# EAGLE board headstageNano_CMOS_FixedRef (EAGLE 7.1.0)
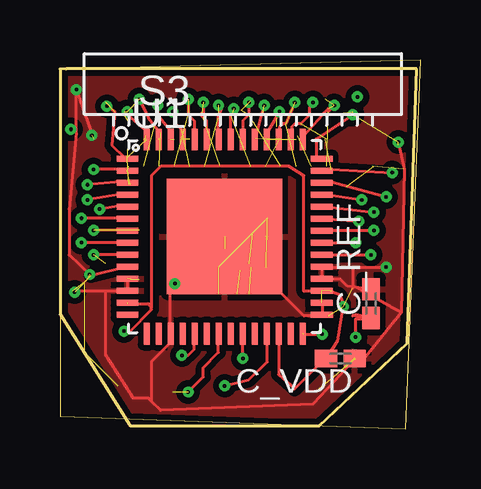
[diagram p0: board, top side]
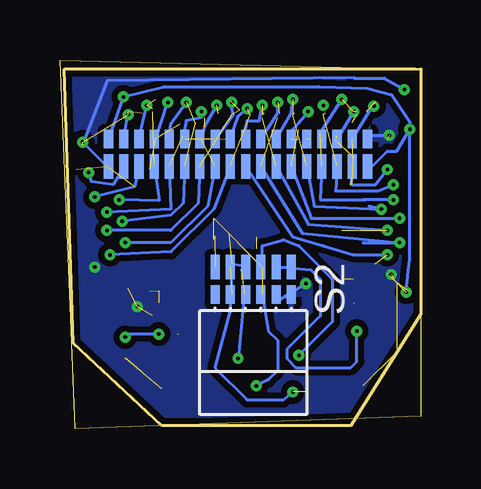
[diagram p1: board, bottom side, seen from below]

Size 15.04 x 15.36 mm. Coordinates in mm from the lower left corner, seen from the top.
Outline: 0,14.98 15.04,15.36 14.4,0 0,0.51 0,4.76
Outline: 0,14.98 0.25,14.99 14.86,14.99 14.48,3.56 10.79,0.13 2.92,0.13 0,4.76
Outline: 0,14.98 0,4.76
Copper layers (1*16): Top 0.0178mm / dielectric 59mil / Bottom 0.0178mm
Design rules "default": minimum track width 5mil, minimum drill 10mil, track to track 5mil, track to pad 5mil, pad to pad 5mil, via to via 5mil, smd to smd 5mil, copper to edge 10mil, drill to drill 16mil, minimum pad ring 6mil, minimum via ring 6mil, stop-mask expansion 3mil, vias tented up to drill 0mil, thermal gap 10mil

## Footprints (pad centres in the part's own frame; a part is rotated, then mirrored left to right if it is on the bottom)
C0402K = smd 0.925 x 0.74: 1 -0.6,0; 2 0.6,0
OMNETICS_PZN-12-AA = smd 0.381 x 0.762: B1 1.587,-1.016; B2 0.953,-1.016; B3 0.318,-1.016; B4 -0.318,-1.016; B5 -0.953,-1.016; B6 -1.587,-1.016 | smd 0.381 x 1.016: T1 1.587,-2.159; T2 0.953,-2.159; T3 0.318,-2.159; T4 -0.318,-2.159; T5 -0.953,-2.159; T6 -1.587,-2.159
OMNETICS_A79025 = smd 0.381 x 0.762 bottom: B1 -5.397,-1.016; B2 -4.763,-1.016; B3 -4.128,-1.016; B4 -3.493,-1.016; B5 -2.857,-1.016; B6 -2.223,-1.016; B7 -1.587,-1.016; B8 -0.953,-1.016; B9 -0.318,-1.016; B10 0.318,-1.016; B11 0.953,-1.016; B12 1.587,-1.016; B13 2.223,-1.016; B14 2.857,-1.016; B15 3.493,-1.016; B16 4.128,-1.016; B17 4.763,-1.016; B18 5.397,-1.016 | smd 0.381 x 1.016 bottom: T1 -5.397,-2.159; T2 -4.763,-2.159; T3 -4.128,-2.159; T4 -3.493,-2.159; T5 -2.857,-2.159; T6 -2.223,-2.159; T7 -1.587,-2.159; T8 -0.953,-2.159; T9 -0.318,-2.159; T10 0.318,-2.159; T11 0.953,-2.159; T12 1.587,-2.159; T13 2.223,-2.159; T14 2.857,-2.159; T15 3.493,-2.159; T16 4.128,-2.159; T17 4.763,-2.159; T18 5.397,-2.159
QFN56_8_X_8_LARGE = smd 0.9 x 0.25: 1 -4.05,3.25; 2 -4.05,2.75; 3 -4.05,2.25; 4 -4.05,1.75; 5 -4.05,1.25; 6 -4.05,0.75; 7 -4.05,0.25; 8 -4.05,-0.25; 9 -4.05,-0.75; 10 -4.05,-1.25; 11 -4.05,-1.75; 12 -4.05,-2.25; 13 -4.05,-2.75; 14 -4.05,-3.25; 29 4.05,-3.25; 30 4.05,-2.75; 31 4.05,-2.25; 32 4.05,-1.75; 33 4.05,-1.25; 34 4.05,-0.75; 35 4.05,-0.25; 36 4.05,0.25; 37 4.05,0.75; 38 4.05,1.25; 39 4.05,1.75; 40 4.05,2.25; 41 4.05,2.75; 42 4.05,3.25 | smd 0.25 x 0.9: 15 -3.25,-4.05; 16 -2.75,-4.05; 17 -2.25,-4.05; 18 -1.75,-4.05; 19 -1.25,-4.05; 20 -0.75,-4.05; 21 -0.25,-4.05; 22 0.25,-4.05; 23 0.75,-4.05; 24 1.25,-4.05; 25 1.75,-4.05; 26 2.25,-4.05; 27 2.75,-4.05; 28 3.25,-4.05; 43 3.25,4.05; 44 2.75,4.05; 45 2.25,4.05; 46 1.75,4.05; 47 1.25,4.05; 48 0.75,4.05; 49 0.25,4.05; 50 -0.25,4.05; 51 -0.75,4.05; 52 -1.25,4.05; 53 -1.75,4.05; 54 -2.25,4.05; 55 -2.75,4.05; 56 -3.25,4.05 | smd 4.8 x 4.8: CENTER 0,0

## Placement (x,y rotation side)
C_REF  10nF  [C0402K]  12.95,5.21 90 top
C_VDD  10uF  [C0402K]  11.68,2.92 180 top
S2  RHD2000-CABLE-AMP-SIDE  [OMNETICS_PZN-12-AA]  6.98,4.57 180 bottom
S3  OMNETICS_A79025  [OMNETICS_A79025]  7.62,13.08 0 top
U1  RHD2132_QFN  [QFN56_8_X_8_LARGE]  6.86,8 0 top

## Library data of the parts
C_REF C_VDD = resistor
S2 U1 = RHD2000
S3 = RHD2000b

## Nets
ADC_REF: C_REF.1 U1.28
AUXOUT: U1.27
CS+: S2.T1 U1.19
GND: C_REF.2 C_VDD.1 S2.B6 S3.B1 S3.T18 U1.11 U1.12 U1.17 U1.29 U1.32 U1.33 U1.CENTER
IN0: S3.T9 U1.9
IN1: S3.T8 U1.8
IN2: S3.T7 U1.7
IN3: S3.T6 U1.6
IN4: S3.T5 U1.5
IN5: S3.T4 U1.4
IN6: S3.T3 U1.3
IN7: S3.T2 U1.2
IN8: S3.B2 U1.1
IN9: S3.B3 U1.56
IN10: S3.B4 U1.55
IN11: S3.B5 U1.54
IN12: S3.B6 U1.53
IN13: S3.B7 U1.52
IN14: S3.B8 U1.51
IN15: S3.B9 U1.50
IN16: S3.B10 U1.49
IN17: S3.B11 U1.48
IN18: S3.B12 U1.47
IN19: S3.B13 U1.46
IN20: S3.B14 U1.45
IN21: S3.B15 U1.44
IN22: S3.B16 U1.43
IN23: S3.B17 U1.42
IN24: S3.T17 U1.41
IN25: S3.T16 U1.40
IN26: S3.T15 U1.39
IN27: S3.T14 U1.38
IN28: S3.T13 U1.37
IN29: S3.T12 U1.36
IN30: S3.T11 U1.35
IN31: S3.T10 U1.34
MISO1+: S2.T4 U1.25
MOSI+: S2.T3 U1.23
REF: S3.B18 S3.T1 U1.10
SCLK+: S2.T2 U1.21
VDD: C_VDD.2 S2.T6 U1.13 U1.26 U1.30 U1.31

## Tracks (layer width: path | path; a pad name or v marks a point on that pad's centre or on a via)
ADC_REF  (via drill 0.15)  (1 unrouted)
  Top 0.127: C_REF.1 12.35,4.73 12.19,4.7 13.08,4.57 12.32,4.57 v12.32,3.81 | 10.16,4.19 10.16,3.94 v10.92,3.94
  Bottom 0.127: v10.92,3.94 12.19,3.94 v12.32,3.81
CS+  (via drill 0.15)  (4 unrouted)
  Top 0.127: v5.08,3.05 5.33,3.05 5.59,3.3 5.59,3.93 U1.19
  Bottom 0.127: 6.6,6.73 6.6,7.62 5.71,7.87 5.08,7.62 3.68,6.22 3.68,4.45 v5.08,3.05
GND  (via drill 0.15)  (15 unrouted)
  Top 0.076: 12.32,2.92 12.19,2.79
  Top 0.127: 11.18,4.7 11.05,4.7 | 11.05,4.7 10.16,4.7 8.76,6.1 | 4.57,5.71 4.83,5.71 v4.79,6.04 | v4.79,6.04 5.33,6.22 5.08,6.22 6.86,7.49 | v4.79,6.04 4.7,5.84 | 4.7,5.84 4.57,5.71 | 14.22,4.83 12.41,5.84 C_REF.2 11.97,5.93 11.68,6.22 10.94,6.22 | C_VDD.1 12.28,2.79 12.57,2.79 14.22,4.83 | 14.22,4.83 14.35,10.8 14.1,11.94 | 1.9,5.71 1.9,3.05 3.05,1.27 3.68,1.27 3.81,1.14 | 12.32,2.92 10.54,1.02 4.19,0.76 3.81,1.14 | 4.83,5.97 4.7,5.84 | 4.57,5.71 4.57,4.19 4.61,4.16 U1.17 4.61,3.59 3.81,2.79 3.81,1.14 | 10.94,6.22 10.92,6.22 | 1.9,5.71 2.92,5.71 2.79,5.75 U1.12 U1.11 | 10.94,6.22 U1.32 U1.33 | U1.29 11,4.75 11.05,4.7 | 10.94,6.22 10.94,6.72 10.92,6.73 12.19,6.73 | 12.19,6.73 v13.59,6.73 | 12.19,6.73 12.19,5.84 | v1.23,6.42 0.38,7.24 0.38,9.14 0.69,12.32 v0.69,14.12 1.4,12.07 | 1.9,5.71 0.51,5.71
  Bottom 0.127: 14.1,11.81 13.06,14.5 2.77,14.63 | S2.B6 5.97,5.33 v4.79,6.04 | S3.B1 2.07,12.22 v1.32,12.22
  other vias: 11.81,5.08
  pour Top (isolate 0.254): -0.89,15.62 -1.27,0.7 4.19,-0.38 7.75,-1.02 15.24,0.76 15.62,15.62
  pour Bottom (isolate 0.254): -1.14,15.75 -1.27,0.95 -0.76,0.51 7.49,-0.89 14.48,0.76 15.49,14.99
IN0  (via drill 0.15)  (1 unrouted)
  Top 0.127: v1.4,7.24 2.8,7.24 U1.9
  Bottom 0.127: S3.T9 5.33,8 4.06,7.62 U1.9 v1.4,7.24
IN1  (via drill 0.15)  (1 unrouted)
  Top 0.127: v0.89,7.75 U1.8 | v5.97,13.59 5.97,12.95
  Bottom 0.127: 2.41,7.75 v0.89,7.75 4.95,8.13 S3.T8
IN2  (via drill 0.15, 0.15 pad 0.15)  (2 unrouted)
  Top 0.127: v1.4,8.25 U1.7 | v6.6,13.46 6.73,13.34 6.6,12.95
  Bottom 0.127: S3.T7 4.7,8.51 v1.4,8.25
IN3  (via drill 0.15, 0.15 pad 0.15)  (1 unrouted)
  Top 0.127: v0.89,8.76 2.41,8.76 2.42,8.75 U1.6 | v4.7,13.21 4.83,12.95 4.83,12.7 5.08,12.45
  Bottom 0.127: S3.T6 4.57,8.76 v0.89,8.76
IN4  (via drill 0.15)  (1 unrouted)
  Top 0.127: v1.65,9.14 2.41,9.27 2.43,9.25 U1.5 | v5.33,13.72 5.33,13.08
  Bottom 0.127: 2.16,9.27 v1.65,9.14 4.45,9.27 S3.T5
IN5  (via drill 0.15)  (2 unrouted)
  Top 0.127: v1.14,9.53 2.67,9.78 2.7,9.75 U1.4 | v3.3,13.72 3.68,12.95 4.06,12.45
  Bottom 0.127: v1.14,9.53 2.3,9.54 | 2.3,9.54 2.41,9.53 | v3.3,13.72 4.19,12.32 | S3.T4 4.19,9.53 2.3,9.54
  other vias: 2.79,13.21
IN6  (via drill 0.15)  (1 unrouted)
  Top 0.127: v1.14,10.16 2.54,10.29 2.58,10.25 U1.3 | v4.06,13.46 4.06,13.08
  Bottom 0.127: S3.T3 3.56,9.91 1.78,9.91 v1.14,10.16
IN7  (via drill 0.15)  (2 unrouted)
  Top 0.127: v1.4,10.8 2.76,10.8 U1.2 | v1.96,13.44 2.29,13.21
  Bottom 0.127: S3.T2 2.92,10.16
IN8  (2 unrouted)
  Bottom 0.127: S3.B2 2.01,13.45 | 2.86,10.16 1.9,10.16 1.4,10.8
IN9  (8 unrouted)
  Top 0.127: U1.56 3.56,12.1 3.56,12.45 2.67,13.21 | 2.29,13.21 2.16,11.81 2.67,11.3 2.79,11.3
  Bottom 0.127: S3.B3 2.79,13.21
IN10  (1 unrouted)
IN11  (2 unrouted)
  Top 0.127: 4.06,13.08 4.57,12.45 4.57,12.09 U1.54
IN12  (1 unrouted)
  Bottom 0.127: S3.B6 5.4,12.38 4.7,13.21
IN13  (2 unrouted)
  Top 0.127: 5.33,13.08 5.59,12.83 5.59,12.2 U1.52
  Bottom 0.127: S3.B7 5.4,13.14 5.33,13.72
IN14  (1 unrouted)
  Top 0.127: 5.91,13.14 5.84,13.08 6.1,12.83 6.1,12.06 U1.51
  Bottom 0.127: S3.B8 5.97,13.14 5.97,13.59
IN15  (2 unrouted)
  Top 0.127: 6.6,13.08 U1.50
  Bottom 0.127: S3.B9 7.37,12.13 7.24,12.83 6.73,12.83 6.6,13.46
IN16  (2 unrouted)
  Top 0.127: 7.11,13.08 U1.49
  Bottom 0.127: S3.B10 7.62,13.02 7.24,13.34
IN17  (2 unrouted)
  Top 0.127: 7.87,13.08 7.62,12.83 7.62,12.06 U1.48
  Bottom 0.127: S3.B11 7.81,13.08 7.94,13.65
IN18  (2 unrouted)
  Top 0.127: 8.51,13.46 8.38,13.08 8.13,12.07 U1.47
IN19  (1 unrouted)
IN20  (1 unrouted)
  Top 0.127: 9.4,12.7 9.27,12.7 9.14,12.57 9.14,12.09 U1.45
  Bottom 0.127: S3.B14 10.41,12.7 9.78,13.59
IN21  (1 unrouted)
  Top 0.127: U1.44 9.61,12.28 9.65,12.32 9.65,12.57 9.78,12.7 10.03,12.7 10.41,13.08 10.41,13.4
IN22  (2 unrouted)
  Top 0.127: U1.43 10.11,12.39 10.16,12.19 11.18,13.34 10.98,13.14
  Bottom 0.127: S3.B16 11.43,13.46
IN23  (2 unrouted)
  Top 0.127: 12.19,13.08 10.67,12.07 10.67,11.3 10.72,11.25 U1.42
  Bottom 0.127: S3.B17 12.19,13.21
IN24  (via drill 0.15)  (1 unrouted)
  Top 0.127: v13.84,10.67 11.3,10.8 11.26,10.75 U1.41 | 10.54,13.72 v10.54,13.59
  Bottom 0.127: 11.05,12.07 v10.54,13.59 | S3.T17 12.83,10.16 13.72,10.29 v13.84,10.67
IN25  (via drill 0.15)  (2 unrouted)
  Top 0.127: v13.59,9.65 11.3,10.29 11.27,10.25 U1.40
  Bottom 0.127: v14.1,11.94 13.08,10.92 | S3.T16 11.92,10.09 v13.59,9.65
  other vias: 12.19,13.08
IN26  (via drill 0.15)  (1 unrouted)
  Top 0.127: v12.57,9.53 10.94,9.78 U1.39 | v11.43,13.46 11.18,13.21
  Bottom 0.127: S3.T15 10.91,9.5 v12.57,9.53
IN27  (via drill 0.15)  (1 unrouted)
  Top 0.127: v13.08,9.02 10.93,9.27 U1.38
  Bottom 0.127: v9.14,13.21 9.14,12.95 9.78,12.83 9.91,12.19 9.78,12.19 | S3.T14 10.41,9.14 v13.08,9.02
IN28  (via drill 0.15)  (1 unrouted)
  Top 0.127: v12.45,8.64 10.92,8.76 U1.37 | v9.78,13.59 9.4,12.7
  Bottom 0.127: S3.T13 9.91,9.4 10.41,8.89 v12.45,8.64
IN29  (via drill 0.15)  (1 unrouted)
  Top 0.127: v13.08,8.25 U1.36 | v7.87,13.59 7.87,13.08
  Bottom 0.127: S3.T12 9.27,9.4 10.41,8.25 v13.08,8.25
IN30  (via drill 0.15)  (2 unrouted)
  Top 0.127: v12.32,7.75 U1.35 | 8.64,12.32 9.02,12.95 9.14,13.21
  Bottom 0.127: v8.51,13.46 9.02,12.57 9.14,12.07 | S3.T11 8.89,9.27 10.41,7.75 v12.32,7.75
IN31  (via drill 0.15)  (1 unrouted)
  Top 0.127: v12.95,7.24 11.18,7.24 11.16,7.25 U1.34 | v7.24,13.34 7.11,13.08
  Bottom 0.127: S3.T10 8.64,9.14 10.41,7.37 v12.95,7.24
MISO1+  (via drill 0.15)  (1 unrouted)
  Top 0.076: 8.64,3.56 U1.25
  Top 0.127: v6.86,1.78 7.86,2.03 8.64,2.78 8.64,3.56
  Bottom 0.076: S2.T4 6.6,6.73
  Bottom 0.127: 6.6,5.59 6.35,4.06 5.97,3.68 5.97,2.41 6.35,2.03 v6.86,1.78
MOSI+  (via drill 0.15)  (2 unrouted)
  Top 0.127: v7.62,2.92 7.62,3.81 7.62,3.94 U1.23
  Bottom 0.076: 7.24,6.6 7.49,6.6 | 7.37,6.79 S2.T3
  Bottom 0.127: S2.T3 7.24,6.6 | 7.37,5.59 v7.62,2.92 | 7.87,6.86 7.37,6.79
N$1
  Bottom 0.127: 2.79,14.61 1.52,14.61 0.63,14.1
N$2  (2 unrouted)
REF  (via drill 0.15)  (1 unrouted)
  Top 0.127: U1.10 1.29,6.37
  Bottom 0.127: v0.61,5.69 0.53,6.58 0.46,7.04 v0.46,12.47 | v0.46,12.47 0.46,12.78 1.22,13.92 2.23,14.17 4.22,14.25 10.69,14.25 v12.39,13.82 S3.B18 | S3.T1 2.03,10.92 1.4,11.56 1.02,11.56 v0.46,12.47
SCLK+  (via drill 0.15)  (2 unrouted)
  Top 0.076: 6.6,3.56 U1.21
  Top 0.127: v5.33,1.52 5.97,2.16 5.97,2.54 6.6,3.18 6.6,3.56
  Bottom 0.076: 7.87,5.59 7.87,6.73 7.87,6.98
  Bottom 0.127: 7.87,6.73 7.95,4.95 8.59,2.54 7.24,1.19 5.71,1.19 v5.33,1.52
VDD  (via drill 0.15)  (3 unrouted)
  Top 0.127: 2.79,5.21 3.66,5.21 | v2.67,4.06 2.92,4.06 3.81,4.95 3.81,5.05 | U1.26 9.11,2.25 9.78,1.65 11.05,2.92 C_VDD.2 11.56,3.65 11.81,5.21 11.63,5.59 11.3,5.71 10.16,5.71 10.16,10.54 9.52,10.92 4.19,10.92 3.81,10.54 3.81,5.21 | 3.81,5.21 3.81,5.05 | 3.81,5.05 3.66,5.21 | 3.66,5.21 3.81,5.21 | U1.30 10.92,5.25 10.92,4.83
  Bottom 0.076: 5.4,7.18 5.4,6.79
  Bottom 0.127: 5.4,7.18 S2.T6 6.03,6.73 4.57,6.6 4.19,6.22 4.19,4.7 5.59,3.3 5.59,2.92 5.21,2.54 2.92,2.54 2.67,2.79 v2.67,4.06

## Text on the board
tDocu: open-ephys | .org
bDocu: 32ch headstage | open-ephys.org | mini | rev 2.1 omnetics